# Altium PCB Booster_Common_Channel_RF.PcbDoc (part 1 of 3)
Units mm, origin at the board's own origin, x right, y up, seen from the top; angles counter-clockwise.
Board outline 159.2 x 28.7 mm, 2 copper layers (Top Layer, Bottom Layer), stack 1.071 mm thick; 192 components, 112 nets, 503 pads, 510 vias.
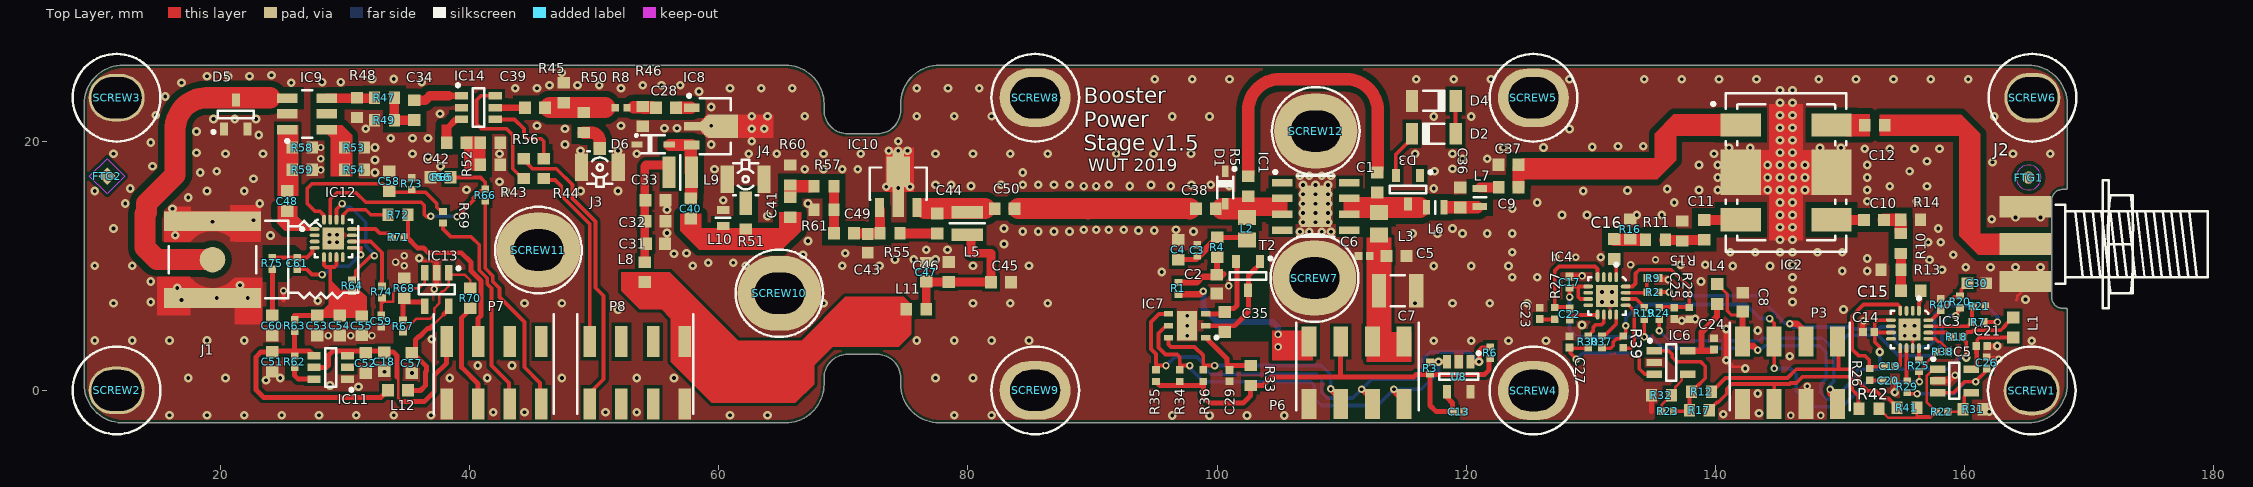
[diagram p0: Top Layer view]
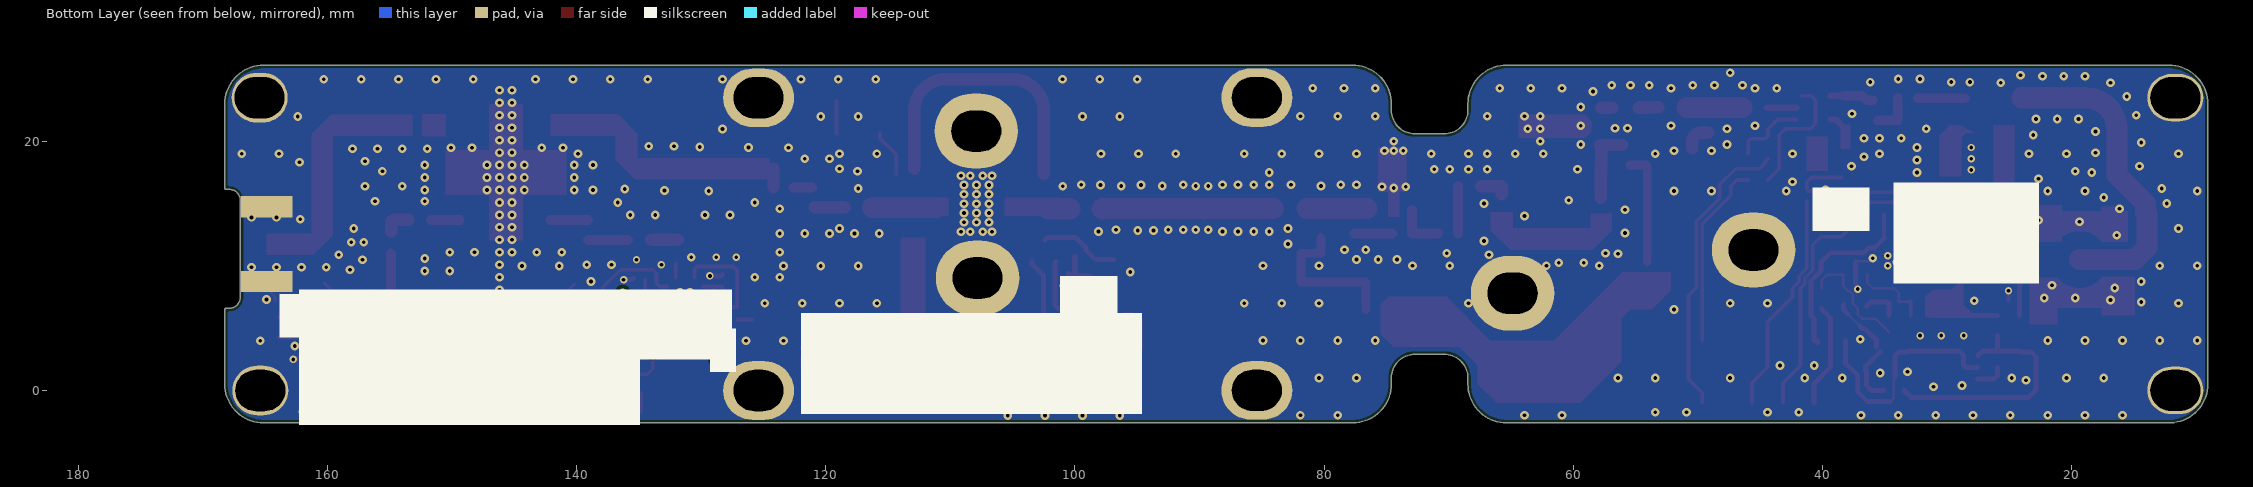
[diagram p1: Bottom Layer view, seen from below]
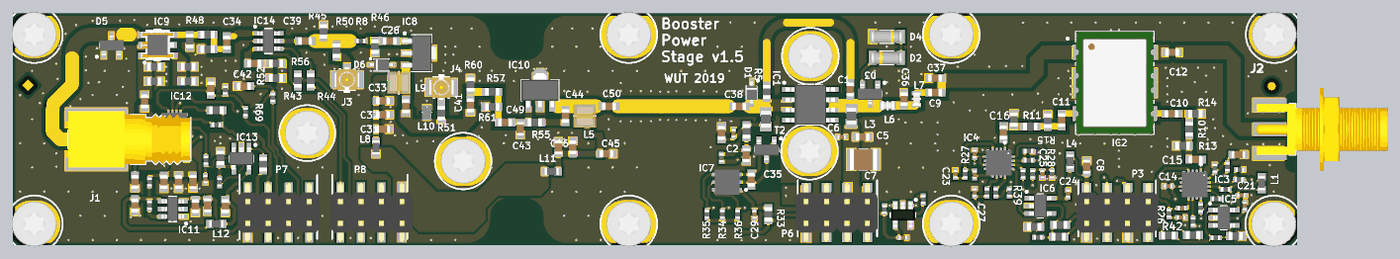
[diagram p3: 3D render of the assembled board from above, using the file's embedded part models]

## Layer stack, top to bottom
Top Layer: signal copper 0.0356
Dielectric 1: dielectric 1, FR408, Dk 3.67
Bottom Layer: signal copper 0.0356

## Board outline
12.028,-2.62 ccw(c12.05,-2.52) 12.05,-2.622 65.35,-2.622 ccw(c65.35,0.48) 68.452,0.48 68.452,0.98 ccw(c68.35,0.98) 68.452,0.981 cw(c70.35,0.98) 70.35,2.878 72.7,2.878 cw(c72.7,0.98) 74.598,0.98 74.598,0.48 cw(c74.7,0.48) 74.598,0.481 74.598,0.48 ccw(c77.7,0.48) 77.7,-2.622 165.15,-2.622 ccw(c165.15,0.48) 168.252,0.48 168.252,6.47 ccw(c168.15,6.47) 168.15,6.572 167.9,6.572 cw(c167.9,7.47) 167.002,7.47 167.002,15.22 cw(c167.9,15.22) 167.9,16.118 168.15,16.118 ccw(c168.15,16.22) 168.252,16.22 168.252,22.98 ccw(c165.15,22.98) 165.15,26.082 77.7,26.082 ccw(c77.7,22.98) 74.598,22.98 ccw(c74.7,22.98) 74.598,22.979 74.598,22.48 cw(c72.7,22.48) 72.7,20.582 70.35,20.582 cw(c70.35,22.48) 68.452,22.479 ccw(c68.35,22.48) 68.452,22.48 68.452,22.98 ccw(c65.35,22.98) 65.35,26.082 12.15,26.082 ccw(c12.15,22.98) 9.048,22.98 9.048,0.48 ccw(c12.15,0.48)

## Design rules (kind name [scope] priority, off if disabled: settings)
AcuteAngle [All] p1: minimum=6.00000000000000E+0001 checktracksonly=FALSE
BoardOutlineClearance [All] p1: gap=0.25 ignorepadtopadclearanceinfootprint=FALSE
Clearance Clearance_50_Ohm [InNetClass('50_Ohm') vs InNet('GND')] p1: gap=0.5 ignorepadtopadclearanceinfootprint=FALSE except(0.152: Arc-SMDPad Track-SMDPad SMDPad-SMDPad)
Clearance [All] p2: gap=0.152 ignorepadtopadclearanceinfootprint=FALSE except(0.279: Arc-Poly Track-Poly SMDPad-Poly THPad-Poly Via-Poly Fill-Fill Fill-Poly Fill-Region Fill-Text Fill-Hole Poly-Poly Poly-Region Poly-Text Poly-Hole Region-Region Region-Text Region-Hole)
ComponentClearance [All] p1: gap=0.1 collisioncheckmode=3 verticalgap=0.254 showdistances=FALSE
HoleSize [All] p1: absolutevalues=TRUE maxlimit=5.08 minlimit=0.127 maxpercent=80.000 minpercent=20.000
MinimumSolderMaskSliver [All] p1: minsoldermaskwidth=0.1
PolygonConnect [All] p1: connectstyle=Direct reliefconductorwidth=0.254 reliefentries=4 polygonreliefangle="90 Angle" airgapwidth=0.254
RoomDefinition Booster_Common_Channel_RF [InComponentClass('Booster_Common_Channel_RF')] p1 off: confinementstyle=ConfineIn formatcopy=TRUE lockcomponents=FALSE outline 169.35,-1.1 296.149,-1.1 296.149,10 169.35,10
RoomDefinition U_Booster_PA_OUT [InComponentClass('U_Booster_PA_OUT')] p2 off: confinementstyle=ConfineIn formatcopy=TRUE lockcomponents=FALSE outline -58.75,-41 -7.95,-41 -7.95,-15.6 -58.75,-15.6
RoomDefinition U_Booster_PA_PREAMP [InComponentClass('U_Booster_PA_PREAMP')] p3 off: confinementstyle=ConfineIn formatcopy=TRUE lockcomponents=FALSE outline 63.39,25.5 6.415,25.5 6.415,-0.6 63.39,-0.6
RoutingVias [All] p1: holewidth=0.711 width=1.27 viastyle="Through Hole" minholewidth=0.711 minwidth=1.27 maxholewidth=0.711 maxwidth=1.27
SolderMaskExpansion [All] p1: expansion=0.102 istentingtop=FALSE
Width Width_50_Ohm [InNetClass('50_Ohm')] p1: maxlimit=2.123 minlimit=0.279 preferedwidth=1.7 minimp=50.000000 maximp=50.000000 favimp=50.000000
Width [All] p2: maxlimit=2 minlimit=0.2 preferedwidth=0.5 minimp=50.000000 maximp=50.000000 favimp=50.000000
27 further rules are at their usual default settings.

## Classes and differential pairs
component class Booster_Common_Channel_RF: FTG1 FTG2 SCREW1 SCREW2 SCREW3 SCREW4 SCREW5 SCREW6 SCREW7 SCREW8 SCREW9 SCREW10 SCREW11 SCREW12
component class U_Booster_PA_OUT: C1 C2 C3 C4 C5 C6 C7 C8 C9 C10 C11 C12 C13 C14 C15 C16 C17 C19 C20 C21 C22 C23 C24 C25 C26 C27 C29 C30 C35 C36 C37 C38 D1 D2 D3 D4 IC1 IC2 IC3 IC4 IC5 IC6 IC7 J2 L1 L2 L3 L4 L6 L7 P3 P6 R1 R2 R3 R4 R5 R6 R7 R9 R10 R11 R12 R13 R14 R15 R16 R17 R18 R19 R20 R21 R22 R23 R24 R25 R26 R27 R28 R29 R30 R31 R32 R33 R34 R35 R36 R37 R38 R39 R40 R41 R42 T2 U8
component class U_Booster_PA_PREAMP: C18 C28 C31 C32 C33 C34 C39 C40 C41 C42 C43 C44 C45 C46 C47 C48 C49 C50 C51 C52 C53 C54 C55 C56 C57 C58 C59 C60 C61 D5 D6 IC8 IC9 IC10 IC11 IC12 IC13 IC14 J1 J3 J4 L5 L8 L9 L10 L11 L12 P7 P8 R8 R43 R44 R45 R46 R47 R48 R49 R50 R51 R52 R53 R54 R55 R56 R57 R58 R59 R60 R61 R62 R63 R64 R65 R66 R67 R68 R69 R70 R71 R72 R73 R74 R75
net class 50_Ohm: NetC1_1 NetC1_2 NetC9_1 NetC9_2 NetC10_1 NetC10_2 NetC11_1 NetC11_2 NetC12_1 NetC12_2 NetC15_2 NetC16_2 NetC28_1 NetC28_2 NetC34_1 NetC34_2 NetC36_2 NetC38_1 NetC38_2 NetC39_1 NetC39_2 NetC40_1 NetC40_2 NetC41_2 NetC42_1 NetC42_2 NetC43_2 NetC44_2 NetC48_1 NetC49_1 NetD5_3 NetIC9_4 NetIC9_6 NetJ3_1 NetJ4_1

## Components (designator, comment, footprint, x,y, rotation, side; value= is the part's Value field where it differs from the comment)
C1 "470pF" CAPC1608X87N 112.871,16.66 r270 top
C2 "4.7uF" CAPC1709X95N 99.969,8.52 r90 top
C3 "100nF" CAPC1005X55N 98.401,11.23 r270 top
C4 "680pF" CAPC1608X87N 96.9,11.27 r270 top
C5 "680pF" CAPC1608X87N 114.4,10.77 r180 top
C6 "100nF" CAPC1005X55N 111.8,10.77 r0 top
C7 "4.7uF" CAPC3225X270N 114.5,7.97 r180 top
C8 "4.7uF" CAPC1709X95N 142.2,7.07 r270 top
C9 "270pF" CAPC1608X87N 123.408,16.284 r0 top
C10 "2.2nF" CAPC1608X87N 152.733,13.66 r180 top
C11 "2.2nF" CAPC1608X87N 139.1,12.87 r90 top
C12 "2.2nF" CAPC1608X87N 152.8,21.27 r180 top
C13 "100nF" CAPC1005X55N 119.4,-1.73 r180 top
C14 "100nF" CAPC1005X55N 152.3,4.67 r0 top
C15 "2.2nF" CAPC1608X87N 155.7,7.97 r180 top
C16 "2.2nF" CAPC1608X87N 131.882,11.341 r90 top
C17 "100nF" CAPC1005X55N 128.3,8.67 r270 top
C18 "4.7uF" CAPC1709X95N 33.15,2.28 r90 top
C19 "1nF" CAPC1005X55N 154,1.92 r180 top
C20 "100nF" CAPC1005X55N 153.9,0.77 r0 top
C21 "100nF" CAPC1005X55N 161.391,3.54 r180 top
C22 "1nF" CAPC1005X55N 128.306,6.11 r90 top
C23 "100nF" CAPC1005X55N 125.9,6.17 r90 top
C24 "100nF" CAPC1005X55N 139.9,3.72 r270 top
C25 "100nF" CAPC1005X55N 136.7,6.17 r90 top
C26 "10nF" CAPC1005X55N 161.789,2.19 r270 top
C27 "10nF" CAPC1005X55N 128.3,3.87 r270 top
C28 "680pF" CAPC1608X87N 55.75,22.68 r0 top
C29 "100nF" CAPC1005X55N 101,1.17 r90 top
C30 "Undefined" CAPC1608X90N 161,8.58 r180 top
C31 "4.7uF" CAPC1709X95N 54.92,11.745 r180 top
C32 "100nF" CAPC1608X87N 54.92,13.545 r180 top
C33 "680pF" CAPC1608X87N 54.92,15.245 r180 top
C34 "680pF" CAPC1608X87N 35.55,22.48 r90 top
C35 "2.2nF" CAPC1608X87N 100.6,5.47 r90 top
C36 "2.7pF" CAPC1608X87N 119.539,15.47 r270 top
C37 "0.9pF" CAPC1608X87N 123.4,18.09 r0 top
C38 "3.3nF" CAPC1608X87N 99.1,14.57 r180 top
C39 "680pF" CAPC1608X87N 45.25,22.68 r0 top
C40 "39pF" CAPC1608X87N 57.75,14.58 r270 top
C41 "330pF" CAPC1608X87N 65.75,14.68 r90 top
C42 "680pF" CAPC1608X87N 38.95,19.88 r180 top
C43 "Undefined" CAPC1608X90N 71.95,11.78 r90 top
C44 "2.2nF" CAPC1608X87N 77.55,13.38 r90 top
C45 "680pF" CAPC1608X87N 82.65,8.68 r180 top
C46 "100nF" CAPC1608X87N 78.45,9.48 r270 top
C47 "4.7uF" CAPC1709X95N 76.65,9.48 r270 top
C48 "2.2nF" CAPC1608X87N 25.35,15.18 r90 top
C49 "680pF" CAPC1608X87N 70.05,12.58 r0 top
C50 "680pF" CAPC1608X87N 82.95,14.58 r0 top
C51 "100nF" CAPC1608X87N 24.15,2.28 r270 top
C52 "100nF" CAPC1608X87N 31.65,2.17 r90 top
C53 "680pF" CAPC1608X87N 27.75,5.18 r90 top
C54 "100nF" CAPC1608X87N 29.55,5.18 r90 top
C55 "4.7uF" CAPC1709X95N 31.35,5.18 r90 top
C56 "47nF" CAPC1608X87N 37.65,17.08 r180 top
C57 "100nF" CAPC1608X87N 35.357,2.17 r90 top
C58 "100nF" CAPC1608X87N 33.55,16.78 r270 top
C59 "10nF" CAPC1005X55N 32.9,5.54 r90 top
C60 "100nF" CAPC1608X87N 24.15,5.18 r270 top
C61 "1nF" CAPC1005X55N 26.15,10.18 r90 top
D1 "AQ4020-01FTG" SOD2512X110N 100.65,16.27 r270 top
D2 "BZV55-B33" DIOMELF3515N 117.4,20.585 r0 top
D3 "SZNUP1301ML3T1G" SOT95P240X110-3N 115.33,16.095 r270 top
D4 "BZV55-B33" DIOMELF3515N 117.4,23.22 r180 top
D5 "SZNUP1301ML3T1G" SOT95P240X110-3N 21.224,22.13 r90 top
D6 "AQ4021-01FTG-C" SOD2513X114N 54.721,19.73 r0 top
FTG1 "Use only in PCB" FIDUCIAL_TOP_C100-200 165.15,17.07 r90 top
FTG2 "Use only in PCB" FIDUCIAL_TOP_S100-200 10.888,17.18 r90 top
IC1 "NPTB00004A" SOIC127P610X167-9N-R245X335 107.92,14.755 r0 top
IC2 "SYDC-20-62HP+" MINI-CIRCUITS_AH202-1 145.682,17.478 r0 top
IC3 "ADL5904ACPZN-R7" QFN50P300X300X80-17N-S175 155.6,4.87 r270 top
IC4 "ADL5904ACPZN-R7" QFN50P300X300X80-17N-S175 131.3,7.57 r270 top
IC5 "MCP6291T-E/OT" SOT95P270X145-5N 159.2,0.74 r0 top
IC6 "MCP6291T-E/OT" SOT95P270X145-5N 136.45,2.22 r0 top
IC7 "MAX6642ATT94+T" SON95P300X300X80-7N-R160X240 97.6,5.17 r180 top
IC8 "ADL5536ARKZ" ANALOG-DEVICES_SOT-89(RK-3) 59.715,21.18 r0 top
IC9 "TCD-9-1WX+" MINI-CIRCUITS_DB1627 26.95,22.18 r90 top
IC10 "PHA-1+" MINI-CIRCUITS_DF782 74.4,16.58 r0 top
IC11 "ADP3300ARTZ-3.3-RL7" SOT95P280X145-6N 28.85,1.828 r180 top
IC12 "ADL5904ACPZN-R7" QFN50P300X300X80-17N-S175 29.05,12.18 r0 top
IC13 "MCP6291T-E/OT" SOT95P270X145-5N 37.35,8.08 r270 top
IC14 "HMC544AE" SOT95P280X145-6N 40.7,22.68 r0 top
J1 "SMA" LINK_CONSMA002-SMD-G 19.35,10.48 r0 top
J2 "SMA" MOLEX_73251-2120 164.9,11.72 r180 top
J3 "U.FL" HIROSE_U.FL-R-SMT-1(10) 50.45,17.88 r180 top
J4 "U.FL" HIROSE_U.FL-R-SMT-1(10) 62.15,16.93 r0 top
L1 "1000R@100MHz" INDC1608X95N 163.904,5.03 r90 top
L2 "1uH" INDC2113X60N 102.4,12.97 r90 top
L3 "1uH" INDC2113X60N 113,13.37 r270 top
L4 "1000R@100MHz" INDC1608X95N 140.15,7.72 r90 top
L5 "1uH" IND_ABRACON_AISC-1008 79.95,13.38 r90 top
L6 "4.7nH" IND_MURATA_LQW18AN_G8 117.514,14.674 r0 top
L7 "6.8nH" IND_MURATA_LQW18AN_G8 121.1,15.47 r90 top
L8 "1000R@100MHz" INDC1608X95N 54.046,9.47 r90 top
L9 "1uH" IND_ABRACON_AISC-1008 56.9,17.48 r0 top
L10 "330nH" IND_COILCRAFT_0603LS 60.35,13.83 r270 top
L11 "1000R@100MHz" INDC1608X95N 75.85,6.48 r180 top
L12 "1000R@100MHz" INDC1608X95N 34.25,-0.02 r180 top
P3 "ZL264-8DG" HDR2X4_SMD#1 146,1.4 r90 top value=-
P6 "ZL264-8DG" HDR2X4_SMD#1 111.2,1.4 r90 top value=-
P7 "ZL264-8DG" HDR2X4_SMD#2 41.95,1.4 r90 top value="should be fixed with thermal glue"
P8 "ZL264-8DG" HDR2X4_SMD#2 53.45,1.4 r90 top value="should be fixed with thermal glue"
R1 "0" RESC1005X40N 96.9,8.17 r270 top
R2 "0" RESC1005X40N 135,7.87 r0 top
R3 "10k" RESC1005X40N 117.1,1.77 r90 top
R4 "39" RESC1608X55N 100,11.47 r90 top
R5 "750" RESC1608X55N 102.5,16.37 r90 top
R6 "10k" RESC1005X40N 121.925,3 r90 top
R7 "0" RESC1005X40N 161.1,5.47 r0 top
R8 "0" RESC1005X40N 52.15,22.68 r0 top
R9 "0" RESC1005X40N 135.011,9 r180 top
R10 "71R5" RESC1608X55N 154.9,11.77 r90 top
R11 "71R5" RESC1608X55N 135.2,12.07 r180 top
R12 "Undefined" RESC1608X55N 138.9,-0.14 r0 top
R13 "46R4" RESC1608X55N 154.1,9.67 r0 top
R14 "96R5" RESC1608X55N 155.682,13.67 r180 top
R15 "96R5" RESC1608X55N 137.36,12.77 r270 top
R16 "46R4" RESC1608X55N 133.162,12.93 r270 top
R17 "100" RESC1608X55N 138.722,-1.632 r0 top
R18 "10k" RESC1005X40N 159.4,4.27 r180 top
R19 "10k" RESC1005X40N 134.3,6.17 r270 top
R20 "0" RESC1005X40N 159.65,7.089 r90 top
R21 "0" RESC1005X40N 161.194,6.72 r180 top
R22 "10k" RESC1005X40N 158.2,-1.73 r0 top
R23 "10k" RESC1005X40N 136.166,-1.698 r180 top
R24 "0" RESC1005X40N 135.5,6.17 r90 top
R25 "0" RESC1005X40N 156.35,1.96 r90 top
R26 "3R9" RESC1005X40N 152.4,1.27 r270 top
R27 "3R9" RESC1005X40N 127.1,6.17 r270 top
R28 "10k" RESC1005X40N 137.9,6.17 r270 top
R29 "0" RESC1005X40N 155.4,0.27 r90 top
R30 "0" RESC1005X40N 129.8,3.87 r90 top
R31 "20k" RESC1608X55N 160.691,-1.529 r180 top
R32 "20k" RESC1608X55N 135.68,-0.392 r0 top
R33 "39" RESC1608X55N 102.7,1.17 r270 top
R34 "10k" RESC1005X40N 97,1.17 r90 top
R35 "10k" RESC1005X40N 95.1,1.17 r90 top
R36 "10k" RESC1005X40N 98.9,1.17 r90 top
R37 "0" RESC1005X40N 130.9,3.87 r90 top
R38 "0" RESC1005X40N 158.279,3.08 r0 top
R39 "0" RESC1005X40N 132.6,3.87 r270 top
R40 "0" RESC1005X40N 158.1,6.87 r90 top
R41 "100" RESC1608X55N 155.383,-1.402 r0 top
R42 "Undefined" RESC1608X55N 152.335,-1.478 r0 top
R43 "100" RESC1608X55N 44.35,17.78 r90 top
R44 "100" RESC1608X55N 45.95,17.78 r270 top
R45 "Undefined" RESC1608X55N 47.55,23.88 r270 top
R46 "Undefined" RESC1608X55N 53.9,21.98 r90 top
R47 "30" RESC1608X55N 33.15,23.48 r0 top
R48 "180" RESC1608X55N 30.95,22.68 r270 top
R49 "180" RESC1608X55N 33.15,21.68 r180 top
R50 "Undefined" RESC1608X55N 49.15,21.48 r90 top
R51 "Undefined" RESC1608X55N 62.15,13.73 r270 top
R52 "100" RESC1608X55N 41.65,18.08 r180 top
R53 "100" RESC1608X55N 30.75,19.48 r180 top
R54 "100" RESC1608X55N 30.75,17.68 r180 top
R55 "1k" RESC1608X55N 73.75,12.58 r0 top
R56 "100" RESC1608X55N 41.65,19.88 r0 top
R57 "42R2" RESC1608X55N 68.45,16.38 r0 top
R58 "169" RESC1608X55N 26.55,19.48 r180 top
R59 "169" RESC1608X55N 26.55,17.68 r180 top
R60 "130" RESC1608X55N 65.75,17.28 r90 top
R61 "130" RESC1608X55N 68.45,14.48 r180 top
R62 "10k" RESC1005X40N 25.95,2.28 r90 top
R63 "0" RESC1005X40N 25.95,5.18 r90 top
R64 "10k" RESC1005X40N 30.55,8.38 r90 top
R65 "0" RESC1005X40N 37.825,17.08 r0 top
R66 "0" RESC1005X40N 41.25,15.66 r90 top
R67 "10k" RESC1005X40N 34.65,5.146 r90 top
R68 "20k" RESC1608X55N 34.75,8.18 r270 top
R69 "0" RESC1005X40N 37.85,13.88 r90 top
R70 "100" RESC1608X55N 40.05,7.38 r270 top
R71 "0" RESC1005X40N 34.25,12.28 r180 top
R72 "Undefined" RESC1608X55N 34.25,14.08 r0 top
R73 "10k" RESC1005X40N 35.357,16.58 r90 top
R74 "0" RESC1005X40N 32.95,7.88 r90 top
R75 "0" RESC1005X40N 24.15,10.18 r90 top
SCREW1 "M3x6" BOSSARD_BN5687-3061605_v 165.4,-0.03 r0 top locked
SCREW2 "M3x6" BOSSARD_BN5687-3061605_v 11.65,-0.02 r0 top locked
SCREW3 "M3x6" BOSSARD_BN5687-3061605_v 11.65,23.48 r0 top locked
SCREW4 "M3x6" BOSSARD_BN5687-3061605_v 125.4,-0.03 r0 top locked
SCREW5 "M3x6" BOSSARD_BN5687-3061605_v 125.4,23.47 r0 top locked
SCREW6 "M3x6" BOSSARD_BN5687-3061605_v 165.46,23.48 r0 top locked
SCREW7 "M3x6" BOSSARD_BN5687-3061605_v 107.82,9 r0 top locked
SCREW8 "M3x6" BOSSARD_BN5687-3061605_v 85.4,23.48 r0 top locked
SCREW9 "M3x6" BOSSARD_BN5687-3061605_v 85.4,-0.02 r0 top locked
SCREW10 "M3x6" BOSSARD_BN5687-3061605_v 64.86,7.78 r0 top locked
SCREW11 "M3x6" BOSSARD_BN5687-3061605_v 45.52,11.25 r0 top locked
SCREW12 "M3x6" BOSSARD_BN5687-3061605_v 107.92,20.8 r0 top locked
T2 "MMBT3906LT1G" SOT95P240X110-3N 102.483,9.17 r270 top
U8 "DNP" SOT23-5_N 119.4,1.07 r270 top value=24AA01H

## Footprints (in the part's own frame and the unit in brackets; to place one, negate y for a bottom-side part, rotate by r counter-clockwise, add the part's x,y. Pads: shape width x height; smd on the part's side, far side on the other; paste and mask are expansions set on the pad)
ANALOG-DEVICES_SOT-89(RK-3) [mm] "SOT89, 1.50mm Pitch; 3-Leads, 2.5mm W X 4.5mm L X 1.6mm H body"
  rect 1.25x0.7 smd: 1(-1.89,1.5) 3(-1.89,-1.5)
  rect 1.35x0.7 smd: 2(-1.84,0)
  rect 0.131x0.131 smd: 2(-0.968,-0.491) 2(-0.968,0.49) 2(-0.706,-0.753) 2(-0.706,0.753)
  rect 0.262x0.262 smd: 2(-0.771,-0.556) 2(-0.771,0.556)
  rect 3x0.85 smd: 2(0.335,0)
  rect 2.475x0.525 smd: 2(0.597,-0.688) 2(0.597,0.687)
  Top Layer region: -1.165,0.425 -0.64,0.95 -0.64,-0.95 -1.165,-0.425
  silkscreen extent -2.22,-2.25 1.24,2.57, body extent -2.44,-2.25 1.81,2.25, height 1.6
BOSSARD_BN5687-3061605_v [mm] "M3 L=6mm Hexalobular Socket Pan Head Screw, Fully Threaded - Stainless Steel A2"
  silkscreen extent -3.52,-3.52 3.52,3.52, body extent -2.8,-2.8 2.8,2.8, height 2.4
CAPC1005X55N [mm] "Capacitor, Non-Polarized, Chip; 1.00mm L X 0.50mm W X 0.70mm H, IPC Medium Density"
  rect 0.62x0.62 smd: 1(-0.45,0) 2(0.45,0)
  body extent -0.52,-0.27 0.53,0.28, height 0.55
CAPC1608X87N [mm] "Chip Capacitor, Body 1.6x0.8mm IPC Medium Density"
  rect 0.95x1 smd: 1(-0.8,0) 2(0.8,0)
  body extent -0.87,-0.47 0.88,0.48, height 0.87
CAPC1608X90N [mm] "Chip Capacitor, Body 1.6x0.8mm IPC Medium Density"
  rect 0.95x0.95 smd: 1(-0.75,0) 2(0.75,0)
  body extent -0.85,-0.45 0.85,0.45, height 0.9
CAPC1709X95N [mm] "Capacitor, non-Polarized, Chip; 1.65mm L X 0.85mm W X 0.95mm H,IPC Medium Density"
  rect 0.95x1 smd: 1(-0.75,0) 2(0.75,0)
  body extent -0.87,-0.47 0.88,0.48, height 0.95
CAPC3225X270N [mm] "Chip Capacitor, Body 3.2x2.5mm, IPC Medium Density"
  rect 1.15x2.7 smd: 1(-1.5,0) 2(1.5,0)
  silkscreen extent -0.55,-1.25 0.55,1.25, body extent -1.7,-1.35 1.7,1.35, height 2.7
DIOMELF3515N [mm] "SOD80C, MELF Diode, 2-Leads, Body 3.5x1.5mm, IPC Medium Density"
  rect 1x1.75 smd: 1(-1.75,0) 2(1.75,0)
  silkscreen extent -0.85,-0.8 0.85,0.8, body extent -1.85,-0.8 1.85,0.8, height 1.6
FIDUCIAL_TOP_C100-200 [mm] "Round Fiducial Target, Top Layer, 1.0mm, Top Solder 2.0mm, Keepout =2.0mm"
  round 1 smd paste-0.51 mask+0.5: FTG2(0,0)
  Top Layer keep-out circle w0.1: c0,0 r1
FIDUCIAL_TOP_S100-200 [mm] "Square Fiducial Target, Top Layer, 1.0mm, Top Solder 2.0mm, Keepout =2.0mm"
  rect 1x1 smd rot 45 paste-0.51 mask+0.5: 1(0,0)
  Top Layer keep-out region: 1.414,0 0,-1.414 -1.414,0 0,1.414
HDR2X4_SMD#1 [mm]
  rect 2.4x1.2 smd: 1(-2.5,-3.81) 2(2.5,-3.81) 3(-2.5,-1.27) 4(2.5,-1.27) 5(-2.5,1.27) 6(2.5,1.27) 7(-2.5,3.81) 8(2.5,3.81)
  silkscreen extent -3,-4.79 4,4.83, body extent -3.65,-5.08 3.65,5.08, height 9.3
HDR2X4_SMD#2 [mm]
  rect 2.5x1 smd: 1(-2.5,-3.81) 2(2.5,-3.81) 3(-2.5,-1.27) 4(2.5,-1.27) 5(-2.5,1.27) 6(2.5,1.27) 7(-2.5,3.81) 8(2.5,3.81)
  silkscreen extent -3.3,-4.79 4.7,4.83, body extent -3.65,-5.08 3.65,5.08, height 9.3
HIROSE_U.FL-R-SMT-1(10) [mm] "Up to 6GHz Ultra Small Surface Mount Male Coaxial Connectors U.FL Series"
  rect 1x1.05 smd: 1(0,-1.525)
  rect 1.05x2.2 smd: 2(-1.475,0) 2(1.475,0)
  silkscreen extent -1,-1.3 1,1.55, body extent -1.5,-1.55 1.5,1.55, height 1.25
IND_ABRACON_AISC-1008 [mm] "Inductor, Molded Body; 2.92mm L X 2.79mm W, AISC-1008 Series"
  rect 1.02x2.54 smd: 1(-0.905,0) 2(0.905,0)
  silkscreen extent 0,-1.4 0,1.4, body extent -1.46,-1.39 1.46,1.4, height 2.29
IND_COILCRAFT_0603LS [mm] "SMD Inductor  Body Width 1.27mm Body Lenght 1.8mm Height 1.12mm, 0603LS Series"
  rect 0.64x1.02 smd: 1(-0.64,0) 2(0.64,0)
  silkscreen extent 0,-0.58 0,0.58, body extent -0.9,-0.58 0.9,0.58, height 1.12
IND_MURATA_LQW18AN_G8 [mm] "SMT inductor 0603, Body Width 0.99mm Body Lenght 1.65mm Height 1mm"
  rect 0.57x1.15 smd: 1(-0.715,0) 2(0.715,0)
  silkscreen extent 0,-0.5 0,0.5, body extent -0.82,-0.49 0.83,0.5, height 1
INDC1608X95N [mm] "Chip Inductor, 2-Leads, EIA 0603, Metric 1608, Body 1.6x0.8mm, IPC Medium Density"
  rect 0.95x1 smd: 1(-0.8,0) 2(0.8,0)
  body extent -0.87,-0.47 0.88,0.48, height 0.95
INDC2113X60N [mm] "Chip Inductor, EIA 0805, Metric 2012, Body 2.1x1.25mm, IPC Medium Density"
  rect 1.2x1.45 smd: 1(-0.9,0) 2(0.9,0)
  body extent -1.05,-0.62 1.05,0.63, height 0.6
LINK_CONSMA002-SMD-G [mm] "SSMA Female Right Angled - Surface Mount"
  round 2.05 smd: 1(0,0)
  rect 7.76x1.6 smd: 2(0,-3.08) 2(0,3.08)
  Top Layer region: -3.88,1.44 -3.88,3.88 3.88,3.88 3.88,1.44 1.768,1.44 0.979,2.059 0,2.28 -0.979,2.059 -1.768,1.44 -1.768,1.44
  Top Layer region: 3.88,-1.44 3.88,-3.88 -3.88,-3.88 -3.88,-1.44 -1.768,-1.44 -0.979,-2.059 0,-2.28 0.979,-2.059 1.768,-1.44 1.768,-1.44
  silkscreen extent -3.5,-3.12 11.7,3.12, body extent -3.5,-3.5 11.7,3.5, height 10.8
MINI-CIRCUITS_AH202-1 [mm] "MINI-CIRCUITS AH202-1 Case, Body 12.7mm L X 9.65mm W X 6.35mm H"
  rect 3.23x1.88 smd: 1(3.643,3.81) 4(3.643,-3.81) 5(-3.643,-3.81) 8(-3.643,3.81)
  rect 3.23x2 smd: 2(3.643,0.83) 3(3.643,-0.83) 6(-3.643,-0.83) 7(-3.643,0.83)
  Top Layer region: -1.335,1.78 -4.825,1.78 -4.825,-1.78 -1.335,-1.78 -1.335,-5.46 1.335,-5.46 1.335,-1.78 4.825,-1.78 4.825,1.78 1.335,1.78 1.335,5.46 -1.335,5.46
  silkscreen extent -5.97,-6.35 4.82,6.35, body extent -4.82,-6.35 4.83,6.35, height 6.35
MINI-CIRCUITS_DB1627 [mm] "MINI-CIRCUITS Case Style DB1627 - Body 4.06X3.81mm"
  rect 0.76x1.65 smd: 1(-1.27,1.59) 2(0,1.59) 3(1.27,1.59) 4(1.27,-1.59) 5(0,-1.59) 6(-1.27,-1.59)
  silkscreen extent -2.3,-0.42 1.91,1.72, body extent -1.9,-2.03 1.91,2.03, height 4.06
MINI-CIRCUITS_DF782 [mm] "MINI-CIRCUITS DF782 Case, 1.50mm pitch; 4 pin, 2.44mm W X 4.49mm L"
  rect 0.71x1.5 smd: 1(-1.5,-1.915) 3(1.5,-1.915)
  rect 0.917x2.41 smd: 2(0,-1.46)
  rect 1.905x2.427 smd: 4(0,0.958)
  rect 0.92x0.493 smd: 4(0,2.418)
  Top Layer region: -0.457,-0.751 -0.953,-0.255 -0.953,2.172 -0.46,2.665 0.46,2.665 0.953,2.172 0.953,-0.255 0.457,-0.751 0.457,-2.665 -0.457,-2.665
  silkscreen extent -2.3,-1.3 2.3,1.3, body extent -2.3,-2.12 2.3,2.12, height 1.6
MOLEX_73251-2120 [mm] "50 Ohm, SMA Edge Mount PCB, With Jam Nut And Lock Washer"
  rect 4.19x1.78 smd: 1(0,0)
  rect 4.19x1.7 smd: 2(0,3) 2(0,-3)
  rect 4.19x1.7 smd far side: 2(0,3) 2(0,-3)
  silkscreen extent -14.64,-5.13 -2.44,5.13, body extent -14.64,-5.13 1.62,5.13, height 5.76
QFN50P300X300X80-17N-S175 [mm] "QFN, 0.50mm Pitch, Square; 16 Pin, 3.00mm L X 3.00mm W X 0.80mm H Body (w/Thermal Tab 1.75 X 1.75mm),  IPC Medium Density"
  oval 0.8x0.3 smd: 1(-1.5,0.75) 2(-1.5,0.25) 3(-1.5,-0.25) 4(-1.5,-0.75) 9(1.5,-0.75) 10(1.5,-0.25) 11(1.5,0.25) 12(1.5,0.75)
  oval 0.3x0.8 smd: 5(-0.75,-1.5) 6(-0.25,-1.5) 7(0.25,-1.5) 8(0.75,-1.5) 13(0.75,1.5) 14(0.25,1.5) 15(-0.25,1.5) 16(-0.75,1.5)
  rect 1.75x1.75 smd: 17(0,0)
  silkscreen extent -2.62,-1.5 1.5,1.5, body extent -1.57,-1.57 1.58,1.58, height 0.8
RESC1005X40N [mm] "Chip Resistor, EIA 0402, Metric 1005, Body 1.0x0.5mm, IPC Medium Density"
  rect 0.58x0.62 smd: 1(-0.47,0) 2(0.47,0)
  body extent -0.52,-0.27 0.53,0.28, height 0.4
RESC1608X55N [mm] "Chip Resistor, EIA 0603, Metric 1608, Body 1.6x0.8mm, IPC Medium Density"
  rect 0.9x1 smd: 1(-0.8,0) 2(0.8,0)
  body extent -0.87,-0.47 0.88,0.48, height 0.55
SOD2512X110N [mm] "Small Outline Diode (SOD-323), 1.70mm W X 1.25mm L X 1.10mm H body,  IPC Medium Density"
  rect 0.9x0.5 smd: 1(-1.3,0) 2(1.3,0)
  silkscreen extent -1.62,-0.65 0.85,0.88, body extent -1.35,-0.67 1.35,0.68, height 1.1
SOD2513X114N [mm] "SOD-323 Diode; 1.75mm W X 1.30mm L X 1.14mm H Body, IPC Medium Density"
  rect 0.9x0.5 smd: 1(-1.3,0) 2(1.3,0)
  silkscreen extent -1.45,-0.72 0.95,0.82, body extent -1.4,-0.72 1.4,0.73, height 1.15
SOIC127P610X167-9N-R245X335 [mm] "SOIC, 1.27mm pitch; 8 pin, 3.89mm W X 4.90mm L X 1.67mm H body (w/thermal tab 2.45mm X 3.35mm), IPC Medium Density"
  rect 1.65x0.6 smd: 1(-2.7,1.905) 2(-2.7,0.635) 3(-2.7,-0.635) 4(-2.7,-1.905) 5(2.7,-1.905) 6(2.7,-0.635) 7(2.7,0.635) 8(2.7,1.905)
  rect 2.45x3.35 smd: 9(0,0)
  silkscreen extent -3.37,-2.45 1.5,2.87, body extent -3.05,-2.45 3.05,2.45, height 1.67
SON95P300X300X80-7N-R160X240 [mm] "SON, 0.95mm Pitch; 6 Pin, 3.00mm W X 3mm L X 0.80mm H body (w/Thermal Tab 1.6mm x 2.4mm)"
  rect 0.75x0.45 smd: 1(-1.5,0.95) 2(-1.5,0) 3(-1.5,-0.95) 4(1.5,-0.95) 5(1.5,0) 6(1.5,0.95)
  rect 1.6x2.4 smd: 7(0,0)
  silkscreen extent -2.48,0.83 -2.23,1.07, body extent -1.55,-1.55 1.55,1.55, height 0.8
SOT23-5_N [mm] "SOT23, 5-Leads, Body 2.9x1.6mm, Pitch 0.95mm, Lead Span 2.8mm, IPC Medium Density"
  rect 1.1x0.65 smd: 1(-1.2,0.95) 2(-1.2,0) 3(-1.2,-0.95) 4(1.2,-0.95) 5(1.2,0.95)
  silkscreen extent -2.02,-1.55 0.25,1.73, body extent -1.63,-1.5 1.57,1.5, height 1.1
SOT95P240X110-3N [mm] "SOT23 3-Leads, Pitch 0.95mm, Body 1.3x2.9mm, IPC Medium Density"
  rect 1.05x0.65 smd: 1(-1.15,0.95) 2(-1.15,-0.95) 3(1.15,0)
  silkscreen extent -1.52,-1.45 0.3,1.92, body extent -1.25,-1.5 1.25,1.5, height 1.1
SOT95P270X145-5N [mm] "SOT, 0.95mm Pitch; 5 Pin,1.55mm W X 2.90mm L X 1.45mm H body, IPC Medium Density"
  rect 1.25x0.6 smd: 1(-1.35,0.95) 2(-1.35,0) 3(-1.35,-0.95) 4(1.35,-0.95) 5(1.35,0.95)
  silkscreen extent -1.82,-1.45 0.4,1.87, body extent -1.35,-1.45 1.35,1.45, height 1.45
SOT95P280X145-6N [mm] "SOT23, 6-Leads, Body 1.6x3.0mm, Pitch 0.95mm, IPC Medium Density"
  rect 1.05x0.6 smd: 1(-1.35,0.95) 2(-1.35,0) 3(-1.35,-0.95) 4(1.35,-0.95) 5(1.35,0) 6(1.35,0.95)
  silkscreen extent -1.78,-1.55 0.45,1.92, body extent -1.4,-1.5 1.4,1.5, height 1.45

## Part data
C1: "Non-polarised capacitor", Case=0603, Manufacturer=GENERIC, Manufacturer1 ComponentHeight=0.87mm, Manufacturer1 Example=Multicomp, Manufacturer1 Part Number=MCMT18N471F500CT, Manufacturer Part Number=CC0603_470PF_50V_1%_NP0, Tolerance=±1%, Voltage=50V, Author=GK, Component Type=Standard, CreateDate=03.12.2007, HelpURL=\\cern.ch\dfs\Applications\Altium\Datasheets\CC0603_NP0_PHYCOMP.pdf, LatestRevisionDate=03.12.2007, Mounted=Yes, Part Description="SMD Multilayer Chip Ceramic Capacitor", Part Number=CC0603_470PF_50V_1%_NP0, Pin Count=2, Sense=No, SMD=Yes, Socket=No, Status=Preferred, TC=C0G/NP0
C2 C8 C18 C31 C47 C55: library part CC0603_4.7UF_16V_10%_X5R, "Non-polarised capacitor", Case=0603, Manufacturer=GENERIC, Manufacturer1 ComponentHeight=0.95mm, Manufacturer1 Example="TAIYO YUDEN", Manufacturer1 Part Number=EMK107ABJ475KA-T, Tolerance=±10%, Voltage=16V, Author="CERN DEM JLC", Component Type=Standard, CreateDate=16.12.2013, HelpURL=\\cern.ch\dfs\Applications\Altium\Datasheets\CC0603_X7R_TAIYO-YUDEN_HIGH-VALUE.pdf, LatestRevisionDate=16.09.2014, Manufacturer Part Number=CC0603_4.7UF_16V_10%_X5R, Mounted=Yes, Part Description="SMD Multilayer Chip Ceramic Capacitor", Part Number=CC0603_4.7UF_16V_10%_X5R, Pin Count=2, Sense=No, SMD=Yes, Socket=No, Status=None, TC=X5R
C3 C6 C13 C14 C17 C20 C21 C23 C24 C25 C29: library part CC0402_100NF_50V_10%_X7R, "Non-polarised capacitor", Case=0402, Manufacturer=GENERIC, Manufacturer1 ComponentHeight=0.55mm, Manufacturer1 Example=MURATA, Manufacturer1 Part Number=GRM155R71H104KE14D, Tolerance=±10%, Voltage=50V, Author="CERN DEM MR", Component Type=Standard, CreateDate=30/06/2017, HelpURL=\\cern.ch\dfs\Applications\Altium\Datasheets\CC0402_MURATA_GRM155R71H104KE14D.pdf, LatestRevisionDate=30/06/2017, Manufacturer Part Number=CC0402_100NF_50V_10%_X7R, Mounted=Yes, Part Description="SMD Multilayer Chip Ceramic Capacitor", Part Number=CC0402_100NF_50V_10%_X7R, Pin Count=2, Sense=No, SMD=Yes, Socket=No, Status=None, TC=X7R
C4 C5 C28 C33 C34 C39 C42 C45 C49 C50 C53: library part CC0603_680PF_50V_5%_NP0, "Non-polarised capacitor", Case=0603, Manufacturer=GENERIC, Manufacturer1 ComponentHeight=0.87mm, Manufacturer1 Example=PHYCOMP, Manufacturer1 Part Number=223886715681, Tolerance=±5%, Voltage=50V, Author="CERN DEM JLC", Component Type=Standard, CreateDate=03.12.2007, HelpURL=\\cern.ch\dfs\Applications\Altium\Datasheets\CC0603_NP0_PHYCOMP.pdf, LatestRevisionDate=03.12.2007, Manufacturer Part Number=CC0603_680PF_50V_5%_NP0, Mounted=Yes, Part Description="SMD Multilayer Chip Ceramic Capacitor", Part Number=CC0603_680PF_50V_5%_NP0, Pin Count=2, Sense=No, SMD=Yes, Socket=No, Status=Preferred, TC=C0G/NP0
C7: library part CC1210_4.7UF_50V_10%_X7R, "Non-polarised capacitor", Case=1210, Manufacturer=GENERIC, Manufacturer1 ComponentHeight=2.7mm, Manufacturer1 Example=KEMET, Manufacturer1 Part Number=C1210C475K5RAC, Tolerance=±10%, Voltage=50V, Author="CERN DEM JLC", Component Type=Standard, CreateDate=01.04.2009, HelpURL=\\cern.ch\dfs\Applications\Altium\Datasheets\CC1210_X7R_KEMET.pdf, LatestRevisionDate=05.05.2009, Manufacturer Part Number=CC1210_4.7UF_50V_10%_X7R, Mounted=Yes, Part Description="SMD Multilayer Chip Ceramic Capacitor", Part Number=CC1210_4.7UF_50V_10%_X7R, Pin Count=2, Sense=No, SMD=Yes, Socket=No, Status=None, TC=X7R
C9: "Non-polarised capacitor", Case=0603, Manufacturer=GENERIC, Manufacturer1 ComponentHeight=0.87mm, Manufacturer1 Example=Kemet, Manufacturer1 Part Number=C0603C271F5GACTU, Manufacturer Part Number=CC0603_270PF_50V_1%_NP0, Tolerance=±1%, Voltage=50V, Author=GK, Component Type=Standard, CreateDate=03.12.2007, HelpURL=\\cern.ch\dfs\Applications\Altium\Datasheets\CC0603_NP0_PHYCOMP.pdf, LatestRevisionDate=03.12.2007, Mounted=Yes, Part Description="SMD Multilayer Chip Ceramic Capacitor", Part Number=CC0603_270PF_50V_1%_NP0, Pin Count=2, Sense=No, SMD=Yes, Socket=No, Status=Preferred, TC=C0G/NP0
C10 C11 C12 C15 C16 C35 C44 C48: library part CC0603_2.2NF_50V_5%_C0G, "Non-polarised capacitor", Case=0603, Manufacturer=GENERIC, Manufacturer1 ComponentHeight=0.9mm, Manufacturer1 Example=TDK, Manufacturer1 Part Number=C1608C0G1H222J080AA, Tolerance=±5%, Voltage=50V, Author="CERN DEM JMW", Component Type=Standard, CreateDate=23.06.2014, HelpURL=\\cern.ch\dfs\Applications\Altium\Datasheets\CC0603_C0G_TDK_C.pdf, LatestRevisionDate=23.06.2014, Manufacturer Part Number=CC0603_2.2NF_50V_5%_C0G, Mounted=Yes, Part Description="SMD Multilayer Chip Ceramic Capacitor", Part Number=CC0603_2.2NF_50V_5%_C0G, Pin Count=2, Sense=No, SMD=Yes, Socket=No, Status=Preferred, TC=C0G/NP0
C19 C22 C61: library part CC0402_1NF_50V_10%_X7R, "Non-polarised capacitor", Case=0402, Manufacturer=GENERIC, Manufacturer1 ComponentHeight=0.55mm, Manufacturer1 Example=PHYCOMP, Manufacturer1 Part Number=223858715623, Tolerance=±10%, Voltage=50V, Author="CERN DEM JLC", Component Type=Standard, CreateDate=03.12.2007, HelpURL=\\cern.ch\dfs\Applications\Altium\Datasheets\CC0402_X7R_PHYCOMP.pdf, LatestRevisionDate=03.12.2007, Manufacturer Part Number=CC0402_1NF_50V_10%_X7R, Mounted=Yes, Part Description="SMD Multilayer Chip Ceramic Capacitor", Part Number=CC0402_1NF_50V_10%_X7R, Pin Count=2, Sense=No, SMD=Yes, Socket=No, Status="Not Recommended", TC=X7R
C26 C27 C59: library part CC0402_10NF_25V_10%_X7R, "Non-polarised capacitor", Case=0402, Manufacturer=GENERIC, Manufacturer1 ComponentHeight=0.55mm, Manufacturer1 Example=TDK, Manufacturer1 Part Number=C1005X7R1E103KT, Tolerance=±10%, Voltage=25V, Author="CERN DEM JLC", Component Type=Standard, CreateDate=25.10.2012, HelpURL=\\cern.ch\dfs\Applications\Altium\Datasheets\CC0402_X7R_TDK_C.pdf, LatestRevisionDate=25.10.2012, Manufacturer Part Number=CC0402_10NF_25V_10%_X7R, Mounted=Yes, Part Description="SMD Multilayer Chip Ceramic Capacitor", Part Number=CC0402_10NF_25V_10%_X7R, Pin Count=2, Sense=No, SMD=Yes, Socket=No, Status=Preferred, TC=X7R
C30 C43: library part CC0603_NO-VALUE, "Non-polarised capacitor", Case=0603, Manufacturer1 ComponentHeight=0.9mm, Author="CERN DEM MR", Component Type=Standard, CreateDate=22.11.2016, HelpURL=Undefined, LatestRevisionDate=22.11.2016, Manufacturer=Undefined, Manufacturer Part Number=CC0603_NO-VALUE, Mounted=No, Part Description="Reserved Footprint For 0603(1608) Chip Ceramic Capacitor", Part Number=CC0603_NO-VALUE, Pin Count=2, Sense=No, SMD=Yes, Socket=No, Status=None
C32 C46 C51 C52 C54 C57 C58 C60: library part CC0603_100NF_50V_10%_X7R, "Non-polarised capacitor", Case=0603, Manufacturer=GENERIC, Manufacturer1 ComponentHeight=0.87mm, Manufacturer1 Example=PHYCOMP, Manufacturer1 Part Number=223858615649, Tolerance=±10%, Voltage=50V, Author="CERN DEM JLC", Component Type=Standard, CreateDate=03.12.2007, HelpURL=\\cern.ch\dfs\Applications\Altium\Datasheets\CC0603_X7R_PHYCOMP.pdf, LatestRevisionDate=03.12.2007, Manufacturer Part Number=CC0603_100NF_50V_10%_X7R, Mounted=Yes, Part Description="SMD Multilayer Chip Ceramic Capacitor", Part Number=CC0603_100NF_50V_10%_X7R, Pin Count=2, Sense=No, SMD=Yes, Socket=No, Status=Preferred, TC=X7R
C36: library part CC0603_2.7PF_50V_0.25PF_NP0, "Non-polarised capacitor", Case=0603, Manufacturer=GENERIC, Manufacturer1 ComponentHeight=0.87mm, Manufacturer1 Example=PHYCOMP, Manufacturer1 Part Number=223886715278, Tolerance=±0.25pF, Voltage=50V, Author="CERN DEM JLC", Component Type=Standard, CreateDate=03.12.2007, HelpURL=\\cern.ch\dfs\Applications\Altium\Datasheets\CC0603_NP0_PHYCOMP.pdf, LatestRevisionDate=03.12.2007, Manufacturer Part Number=CC0603_2.7PF_50V_0.25PF_NP0, Mounted=Yes, Part Description="SMD Multilayer Chip Ceramic Capacitor", Part Number=CC0603_2.7PF_50V_0.25PF_NP0, Pin Count=2, Sense=No, SMD=Yes, Socket=No, Status=Preferred, TC=C0G/NP0
C37: "Non-polarised capacitor", Case=0603, Manufacturer=GENERIC, Manufacturer1 ComponentHeight=0.87mm, Manufacturer1 Example=AVX, Manufacturer1 Part Number=ML03510R9AAT2A, Manufacturer Part Number=CC0603_0.9PF_50V_0.05PF_NP0, Tolerance=±0.05pF, Voltage=50V, Author=GK, Component Type=Standard, CreateDate=03.12.2007, HelpURL=\\cern.ch\dfs\Applications\Altium\Datasheets\CC0603_NP0_PHYCOMP.pdf, LatestRevisionDate=03.12.2007, Mounted=Yes, Part Description="SMD Multilayer Chip Ceramic Capacitor", Part Number=CC0603_0.9PF_50V_0.05PF_NP0, Pin Count=2, Sense=No, SMD=Yes, Socket=No, Status=Preferred, TC=C0G/NP0
C38: library part CC0603_3.3NF_50V_5%_C0G, "Non-polarised capacitor", Case=0603, Manufacturer=GENERIC, Manufacturer1 ComponentHeight=0.9mm, Manufacturer1 Example=TDK, Manufacturer1 Part Number=C1608C0G1H332J080AA, Tolerance=±5%, Voltage=50V, Author="CERN DEM MR", Component Type=Standard, CreateDate=02.11.2016, HelpURL=\\cern.ch\dfs\Applications\Altium\Datasheets\CC0603_C0G_TDK_C.pdf, LatestRevisionDate=02.11.2016, Manufacturer Part Number=CC0603_3.3NF_50V_5%_C0G, Mounted=Yes, Part Description="SMD Multilayer Chip Ceramic Capacitor", Part Number=CC0603_3.3NF_50V_5%_C0G, Pin Count=2, Sense=No, SMD=Yes, Socket=No, Status=Preferred, TC=C0G/NP0
C40: "Non-polarised capacitor", Case=0603, Manufacturer=GENERIC, Manufacturer1 ComponentHeight=0.87mm, Manufacturer1 Example=AVX, Manufacturer1 Part Number=06031A390FAT2A, Manufacturer Part Number=CC0603_39PF_100V_1%_NP0, Tolerance=±1%, Voltage=100V, Author=GK, Component Type=Standard, CreateDate=03.12.2007, HelpURL=\\cern.ch\dfs\Applications\Altium\Datasheets\CC0603_NP0_PHYCOMP.pdf, LatestRevisionDate=03.12.2007, Mounted=Yes, Part Description="SMD Multilayer Chip Ceramic Capacitor", Part Number=CC0603_39PF_100V_1%_NP0, Pin Count=2, Sense=No, SMD=Yes, Socket=No, Status=Preferred, TC=C0G/NP0
C41: library part CC0603_330PF_50V_1%_NP0, "Non-polarised capacitor", Case=0603, Manufacturer=GENERIC, Manufacturer1 ComponentHeight=0.87mm, Manufacturer1 Example=PHYCOMP, Manufacturer1 Part Number=223886718331, Tolerance=±1%, Voltage=50V, Author="CERN DEM MR", Component Type=Standard, CreateDate=06.09.2017, HelpURL=\\cern.ch\dfs\Applications\Altium\Datasheets\CC0603_NP0_PHYCOMP.pdf, LatestRevisionDate=06.09.2017, Manufacturer Part Number=CC0603_330PF_50V_1%_NP0, Mounted=Yes, Part Description="SMD Multilayer Chip Ceramic Capacitor", Part Number=CC0603_330PF_50V_1%_NP0, Pin Count=2, Sense=No, SMD=Yes, Socket=No, Status=None, TC=C0G/NP0
C56: library part CC0603_47NF_25V_10%_X7R, "Non-polarised capacitor", Case=0603, Manufacturer=GENERIC, Manufacturer1 ComponentHeight=0.87mm, Manufacturer1 Example=PHYCOMP, Manufacturer1 Part Number=223891615645, Tolerance=±10%, Voltage=25V, Author="CERN DEM JLC", Component Type=Standard, CreateDate=03/12/2007, HelpURL=\\cern.ch\dfs\Applications\Altium\Datasheets\CC0603_X7R_PHYCOMP.pdf, LatestRevisionDate=03/12/2007, Manufacturer Part Number=CC0603_47NF_25V_10%_X7R, Mounted=Yes, Part Description="SMD Multilayer Chip Ceramic Capacitor", Part Number=CC0603_47NF_25V_10%_X7R, Pin Count=2, Sense=No, SMD=Yes, Socket=No, Status=Preferred, TC=X7R
D1: "4V Transient Voltage Suppressor Diode (Uni-Directional)", Case=SOD323, Manufacturer=Littlefuse, Power=735W, Voltage=4V, Author=GK, Bonding=No, Component Type=Standard, ComponentHeight=1.1mm, CreateDate=28.08.2012, Device=AQ4020-01FTG, HelpURL=\\cern.ch\dfs\Applications\Altium\Datasheets\PESD5V0S1UA.pdf, LatestRevisionDate=18.09.2013, Manufacturer Part Number=AQ4020-01FTG, Mounted=Yes, PackageDescription="Small Outline Diode (SOD-323), 1.70mm W X 1.25mm L X 1.10mm H body,  IPC Medium Density", Part Description="Unidirectional ESD Protection for Transient Voltage Suppression", Part Number=AQ4020-01FTG, Pin Count=2, PressFit=No, Sense=No, SMD=Yes, Socket=No
D2 D4: "Zener Diode", Case=SOD-80C, Manufacturer=NEXPERIA, Power=500mW, Voltage=33V, Author="CERN DEM JLC", Bonding=No, Component Type=Standard, ComponentHeight=1.6mm, CreateDate=25.07.2012, Device=BZV55-B33, HelpURL=\\cern.ch\dfs\Applications\Altium\Datasheets\BZV55.pdf, LatestRevisionDate=22.01.2018, Manufacturer Part Number=BZV55-B33, Mounted=Yes, PackageDescription="SOD80C, MELF Diode, 2-Leads, Body 3.5x1.5mm, IPC Medium Density", Part Description="Voltage Regulator Diode", Part Number=BZV55-B33, Pin Count=2, PressFit=No, Sense=No, SMD=Yes, Socket=No
D3 D5: "Low Capacitance Diode Array for ESD Protection in a Single Data Line", Case=SOT23, Manufacturer=ONSEMI, Power=215mA, Voltage=70V, Author=GK, Bonding=No, Component Type=Standard, ComponentHeight=1.1mm, CreateDate=18.01.2010, Device=SZNUP1301ML3T1G, HelpURL=\\cern.ch\dfs\Applications\Altium\Datasheets\BAR66.pdf, LatestRevisionDate=05.10.2010, Manufacturer Part Number=SZNUP1301ML3T1G, Mounted=Yes, PackageDescription="SOT23 3-Leads, Pitch 0.95mm - Body 1.3x2.9mm, IPC Medium Density", Part Description="Low Capacitance Diode Array for ESD Protection in a Single Data Line", Part Number=SZNUP1301ML3T1G, Pin Count=3, PressFit=No, Sense=No, SMD=Yes, Socket=No
D6: "6V Bi-directional,ESD Protection for Transient Voltage Suppressor Diode", Case=SOD323, Manufacturer=Littlefuse, Power=450W, Voltage=6V, Author=GK, Bonding=No, Component Type=Standard, ComponentHeight=1.14mm, CreateDate=22.07.2015, Device=AQ4021-01FTG-C, HelpURL=\\cern.ch\dfs\Applications\Altium\Datasheets\CDSOD323-T12C-DSL.pdf, LatestRevisionDate=19.12.2017, Manufacturer Part Number=AQ4021-01FTG-C, Mounted=Yes, PackageDescription="SOD-323 Diode; 1.75mm W X 1.30mm L X 1.14mm H Body, IPC Medium Density", Part Description="Bi-directional ESD Protection for Transient Voltage Suppressor Diode", Part Number=AQ4021-01FTG-C, Pin Count=2, PressFit=No, Sense=No, SMD=Yes, Socket=No
FTG1: library part FIDUCIAL_TARGET_C100-200, "Fiducial Target", Author="CERN DEM JLC", Component Type="Standard (No BOM)", ComponentHeight=0mm, CreateDate=09.02.2010, Family=Fiducial, HelpURL=Undefined, LatestRevisionDate=04.04.2012, Mounted=No, PackageDescription="Round Fiducial Target, Top Layer, 1.0mm, Top Solder 2.0mm, Keepout =2.0mm", Part Description="Round Fiducial Target, Top Layer, 1.0mm, Top Solder 2.0mm, Keepout =2.0mm", Part Number=FIDUCIAL_TARGET_C100-200, Pin Count=1, Sense=No, SMD=Yes, Socket=No, Status=None
FTG2: library part FIDUCIAL_TARGET_S100-200, "Fiducial Target", Author="CERN DEM JLC", Component Type="Standard (No BOM)", ComponentHeight=0mm, CreateDate=09.02.2010, Family=Fiducial, HelpURL=Undefined, LatestRevisionDate=04.04.2012, Mounted=No, PackageDescription="Square Fiducial Target, Top Layer, 1.0mm, Top Solder 2.0mm, Keepout =2.0mm", Part Description="Square Fiducial Target, Top Layer, 1.0mm, Top Solder 2.0mm, Keepout =2.0mm", Part Number=FIDUCIAL_TARGET_S100-200, Pin Count=1, Sense=No, SMD=Yes, Socket=No, Status=None
IC1: "GaN Wideband Transistor 28V, 5W, DC - 6GHz", Case=SOIC8, Manufacturer=MACOM, Author="CERN DEM BC", Bonding=No, Component Type=Standard, ComponentHeight=1.67mm, CreateDate=23.08.2019, Device=NPTB00004A, HelpURL=\\cern.ch\dfs\Applications\Altium\Datasheets\NPTB00004A.pdf, LatestRevisionDate=23.08.2019, Manufacturer Part Number=NPTB00004A, Mounted=Yes, PackageDescription="SOIC, 1.27mm pitch; 8 pin, 3.89mm W X 4.90mm L X 1.67mm H body (w/thermal tab 2.45mm X 3.35mm), IPC Medium Density", Part Description="GaN Wideband Transistor 28V, 5W, DC - 6GHz", Part Number=NPTB00004A, Pin Count=9, PressFit=No, Sense=No, SMD=Yes, Socket=No
IC2: "50Ohm, 10 to 540MHz, 25W, 20dB Bi-Directional Coupler", Manufacturer=MINI-CIRCUITS, Author="CERN DEM BC", Bonding=No, ComponentHeight=6.35mm, Component Type=Standard, CreateDate=26.08.2019, Device=SYDC-20-62HP+, HelpURL=\\cern.ch\dfs\Applications\Altium\Datasheets\SYDC-20-62HP+.pdf, LatestRevisionDate=26.08.2019, Manufacturer Part Number=SYDC-20-62HP+, Mounted=Yes, PackageDescription="MINI-CIRCUITS AH202-1 Case, Body 12.7mm L X 9.65mm W X 6.35mm H", Part Description="50Ohm, 10 to 540MHz, 25W, 20dB Bi-Directional Coupler", Part Number=SYDC-20-62HP+, Pin Count=8, PressFit=No, Sense=No, SMD=Yes, Socket=No
IC3 IC4 IC12: "DC to 6 GHz, 45 dB TruPwr Detector With Envelope Threshold Detection", Case=QFN16, Manufacturer="ANALOG DEVICES", Author="CERN DEM MR", Bonding=No, ComponentHeight=0.8mm, Component Type=Standard, CreateDate=26.09.2017, Device=ADL5904ACPZN-R7, HelpURL=\\cern.ch\dfs\Applications\Altium\Datasheets\ADL5904ACPZN-R7.pdf, LatestRevisionDate=26.09.2017, Manufacturer Part Number=ADL5904ACPZN-R7, Mounted=Yes, PackageDescription="QFN, 0.50mm Pitch, Square; 16 Pin, 3.00mm L X 3.00mm W X 0.80mm H Body (w/Thermal Tab 1.75 X 1.75mm),  IPC Medium Density", Part Description="DC to 6 GHz, 45 dB TruPwr Detector With Envelope Threshold Detection", Part Number=ADL5904ACPZN-R7, Pin Count=17, PressFit=No, Sense=No, SMD=Yes, Socket=No
IC5 IC6 IC13: "Operational Amplifier", Case=SOT23-5, Manufacturer="MICROCHIP TECHNOLOGY", Author="CERN DEM BC", Bonding=No, ComponentHeight=1.45mm, Component Type=Standard, CreateDate=22.08.2019, Device=MCP6291T-E/OT, HelpURL=\\cern.ch\dfs\Applications\Altium\Datasheets\MCP6291T-E-OT.pdf, LatestRevisionDate=22.08.2019, Manufacturer Part Number=MCP6291T-E/OT, Mounted=Yes, PackageDescription="SOT, 0.95mm pitch; 5 pin, 1.55mm W X 2.90mm L X 1.45mm H body, IPC Medium Density", Part Description="1.0mA, 10 MHz Rail-to-Rail Operational Amplifier", Part Number=MCP6291T-E/OT, Pin Count=5, PressFit=No, Sense=No, SMD=Yes, Socket=No
IC7: "±1°C, SMBus-Compatible Remote/Local Temperature Sensor with Overtemperature Alarm", Case=SON6, Manufacturer=MAXIM, Author="CERN DEM JLC", Bonding=No, ComponentHeight=0.8mm, Component Type=Standard, CreateDate=26.11.2013, Device=MAX6642ATT94+T, HelpURL=\\cern.ch\dfs\Applications\Altium\Datasheets\MAX6642ATT94+T.pdf, LatestRevisionDate=26.11.2013, Manufacturer Part Number=MAX6642ATT94+T, Mounted=Yes, PackageDescription="SON, 0.95mm Pitch; 6 Pin, 3.00mm W X 3mm L X 0.80mm H body (w/Thermal Tab 1.6mm x 2.4mm)", Part Description="0°C to +125°C, ±1°C, SMBus-Compatible Remote/Local Temperature Sensor with Overtemperature Alarm (Address 1001 010)", Part Number=MAX6642ATT94+T, Pin Count=7, PressFit=No, Sense=No, SMD=Yes, Socket=No
IC8: "20MHz to 1GHz IF Gain Block", Case=SOT89, Manufacturer="ANALOG DEVICES", Author="CERN DEM BC", Bonding=No, ComponentHeight=1.6mm, Component Type=Standard, CreateDate=19.08.2019, Device=ADL5536ARKZ, HelpURL=\\cern.ch\dfs\Applications\Altium\Datasheets\ADL5536ARKZ.pdf, LatestRevisionDate=19.08.2019, Manufacturer Part Number=ADL5536ARKZ, Mounted=Yes, PackageDescription="SOT89, 1.50mm Pitch; 3-Leads, 2.5mm W X 4.5mm L X 1.6mm H body", Part Description="20MHz to 1GHz IF Gain Block", Part Number=ADL5536ARKZ, Pin Count=4, PressFit=No, Sense=No, SMD=Yes, Socket=No
IC9: "50 Ohm, 5 To 2000MHz, Directional Coupler", Manufacturer=MINI-CIRCUITS, Author="CERN DEM BC", Bonding=No, ComponentHeight=4.06mm, Component Type=Standard, CreateDate=22.08.2019, Device=TCD-9-1WX+, HelpURL=\\cern.ch\dfs\Applications\Altium\Datasheets\TCD-9-1WX+.pdf, LatestRevisionDate=22.08.2019, Manufacturer Part Number=TCD-9-1WX+, Mounted=Yes, PackageDescription="MINI-CIRCUITS Case Style DB1627 - Body 4.06X3.81mm", Part Description="50 Ohms, 5 To 2000MHz, Directional Coupler", Part Number=TCD-9-1WX+, Pin Count=6, PressFit=No, Sense=No, SMD=Yes, Socket=No
IC10: "Monolithic Amplifier", Manufacturer=MINI-CIRCUITS, Author="CERN DEM BC", Bonding=No, ComponentHeight=1.6mm, Component Type=Standard, CreateDate=22.08.2019, Device=PHA-1+, HelpURL=\\cern.ch\dfs\Applications\Altium\Datasheets\PHA-1+.pdf, LatestRevisionDate=22.08.2019, Manufacturer Part Number=PHA-1+, Mounted=Yes, PackageDescription="MINI-CIRCUITS DF782 Case, 1.50mm pitch; 4 pin, 2.44mm W X 4.49mm L", Part Description="0.05-6GHz Surface Mount Monolithic Amplifier", Part Number=PHA-1+, Pin Count=4, PressFit=No, Sense=No, SMD=Yes, Socket=No
IC11: "High Accuracy anyCAP® 50 mA Low Dropout Linear Regulator", Case=SOT23-6, Manufacturer="ANALOG DEVICES", Author="CERN DEM JLC", Bonding=No, ComponentHeight=1.45mm, Component Type=Standard, CreateDate=30.11.2011, Device=ADP3300ARTZ-3.3-RL7, HelpURL=\\cern.ch\dfs\Applications\Altium\Datasheets\ADP3300ARTZ-3.3-RL7.pdf, LatestRevisionDate=30.11.2011, Manufacturer Part Number=ADP3300ARTZ-3.3-RL7, Mounted=Yes, PackageDescription="SOT23, 0.95mm pitch; 6 pin, 1.6mm W X 2.9mm L X 1.45mm H body, IPC Medium Density", Part Description="3.3V High Accuracy anyCAP® 50 Ma Low Dropout Linear Regulator", Part Number=ADP3300ARTZ-3.3-RL7, Pin Count=6, PressFit=No, Sense=No, SMD=Yes, Socket=No
IC14: "GaAs MMIC T/R Switch DC - 4 GHz", Case=SOT23-6, Manufacturer="ANALOG DEVICES", Author="CERN DEM MR", Bonding=No, Component Type=Standard, ComponentHeight=1.45mm, CreateDate=26.09.2017, Device=HMC544AE, HelpURL=\\cern.ch\dfs\Applications\Altium\Datasheets\HMC544AE.pdf, LatestRevisionDate=26.09.2017, Manufacturer Part Number=HMC544AE, Mounted=Yes, PackageDescription="SOT23, 6-Leads, Body 1.6x3.0mm, Pitch 0.95mm, IPC Medium Density", Part Description="GaAs MMIC T/R Switch DC - 4 GHz", Part Number=HMC544AE, Pin Count=6, PressFit=No, Sense=No, SMD=Yes, Socket=No
J1: library part LINK_CONSMA002-SMD-G, Manufacturer="LINK TECHNOLOGIES", Manufacturer Part Number=CONSMA002-SMD-G, Author="CERN DEM BC", ComponentHeight=10.8mm, Component Type=Standard, CreateDate=28.08.2019, Family=SMA, HelpURL=\\cern.ch\dfs\Applications\Altium\Datasheets\LINK_CONSMA002-SMD-G.pdf, LatestRevisionDate=28.08.2019, Mounted=Yes, Part Description="SMA Female Right Angled - Surface Mount", Part Number=LINK_CONSMA002-SMD-G, Pin Count=2, PressFit=No, Sense=No, SMD=Yes, Socket=No, Status=None
J2: "50 Ohm, SMA Edge Mount PCB, With Jam Nut And Lock Washer", Manufacturer=MOLEX, Manufacturer Part Number=73251-2120, Part Number=MOLEX_73251-2120, Author="CERN DEM JLC", ComponentHeight=5.75mm, Component Type=Standard, CreateDate=26.10.2016, Family=SMA, HelpURL=\\cern.ch\dfs\Applications\Altium\Datasheets\MOLEX_73251-2121.pdf, LatestRevisionDate=26.10.2016, Mounted=Yes, Part Description="50 Ohm, SMA Edge Mount PCB, With Jam Nut And Lock Washer", Pin Count=5, PressFit=No, Sense=No, SMD=Yes, Socket=No, Status=None
J3 J4: library part HIROSE_U.FL-R-SMT-1(10), Manufacturer="HIROSE (HRS)", Manufacturer Part Number=U.FL-R-SMT-1(10), Author="CERN DEM JLC", ComponentHeight=1.25mm, Component Type=Standard, CreateDate=24.03.2010, Family=U.FL, HelpURL=\\cern.ch\dfs\Applications\Altium\Datasheets\HIROSE_U.FL-R-SMT-1(10).pdf, LatestRevisionDate=24.03.2010, Mounted=Yes, Part Description="Up to 6GHz Ultra Small Surface Mount Male Coaxial Connectors U.FL Series", Part Number=HIROSE_U.FL-R-SMT-1(10), Pin Count=2, PressFit=No, Sense=No, SMD=Yes, Socket=No, Status=None
L1 L4 L8 L11 L12: library part IND0603_MURATA_BLM18HE102SN1, Case=0603, Manufacturer=MURATA, Manufacturer Part Number=BLM18HE102SN1, Power=600mA, Resistance=0.35R, Tolerance=±25%, Author="CERN DEM JLC", ComponentHeight=0.95mm, Component Type=Standard, CreateDate=09.12.2013, HelpURL=\\cern.ch\dfs\Applications\Altium\Datasheets\IND0603_MURATA_BLM18H.pdf, LatestRevisionDate=25.10.2018, Mounted=Yes, Part Description="SMD EMIFIL Suppression Chip Ferrite Bead", Part Number=IND0603_MURATA_BLM18HE102SN1, Pin Count=2, Sense=No, SMD=Yes, Socket=No, Status=None
L2 L3: library part IND0805_1UH_20%_WURTH_74479773210, "Inductor", Case=0805, Manufacturer="WURTH ELEKTRONIK", Manufacturer Part Number=74479773210, Power=800mA, Resistance=0.18R, Tolerance=±20%, Author="CERN DEM BC", ComponentHeight=0.6mm, Component Type=Standard, CreateDate=26.08.2019, HelpURL=\\cern.ch\dfs\Applications\Altium\Datasheets\IND_WURTH_WE-PMI_74479773210.pdf, LatestRevisionDate=26.08.2019, Mounted=Yes, Part Description="Power Multilayer Inductor (WE-PMI Series)", Part Number=IND0805_1UH_20%_WURTH_74479773210, Pin Count=2, Sense=No, SMD=Yes, Socket=No, Status=None
L5 L9: library part IND_1UH_2%_ABRACON_AISC-1008, "Inductor", Case=1008, Manufacturer=ABRACON, Manufacturer Part Number=AISC-1008-1R0G, Power=370mA, Resistance=1.8R, Tolerance=±2%, Author="CERN DEM BC", ComponentHeight=2.29mm, Component Type=Standard, CreateDate=26.08.2019, HelpURL=\\cern.ch\dfs\Applications\Altium\Datasheets\IND_ABRACON_AISC-1008.pdf, LatestRevisionDate=26.08.2019, Mounted=Yes, Part Description="SMD Ceramic Wire-Wound Chip Inductor", Part Number=IND_1UH_2%_ABRACON_AISC-1008, Pin Count=2, Sense=No, SMD=Yes, Socket=No, Status=None
L6: library part IND0603_4.7NH_2%_MURATA_LQW18AN4N7G8Z, "Inductor With Core", Case=0603, Manufacturer=MURATA, Manufacturer Part Number=LQW18AN4N7G8Z, Power=1.5A, Resistance=0R054, Tolerance=±2%, Author="CERN DEM BC", ComponentHeight=1mm, Component Type=Standard, CreateDate=26.08.2019, HelpURL=\\cern.ch\dfs\Applications\Altium\Datasheets\IND_MURATA_LQW18AN4N7G8Z.pdf, LatestRevisionDate=26.08.2019, Mounted=Yes, Part Description="Wirw Wond RF Inductor For Automotive", Part Number=IND0603_4.7NH_2%_MURATA_LQW18AN4N7G8Z, Pin Count=2, Sense=No, SMD=Yes, Socket=No, Status=None
L7: library part IND0603_6.8NH_2%_MURATA_LQW18AN6N8G8Z, "Inductor With Core", Case=0603, Manufacturer=MURATA, Manufacturer Part Number=LQW18AN6N8G8Z, Power=1.9A, Resistance=0R04, Tolerance=±2%, Author="CERN DEM BC", ComponentHeight=1mm, Component Type=Standard, CreateDate=26.08.2019, HelpURL=\\cern.ch\dfs\Applications\Altium\Datasheets\IND_MURATA_LQW18AN6N8G8Z.pdf, LatestRevisionDate=26.08.2019, Mounted=Yes, Part Description="Wirw Wond RF Inductor For Automotive", Part Number=IND0603_6.8NH_2%_MURATA_LQW18AN6N8G8Z, Pin Count=2, Sense=No, SMD=Yes, Socket=No, Status=None
L10: library part IND_330NH_2%_COILCRAFT_0603LS, "Inductor With Core", Case=0603, Manufacturer=COILCRAFT, Manufacturer Part Number=0603LS-331XGL, Power=560mA, Resistance=0R46, Tolerance=±2%, Author="CERN DEM BC", ComponentHeight=1.12mm, Component Type=Standard, CreateDate=29.08.2019, HelpURL=\\cern.ch\dfs\Applications\Altium\Datasheets\IND_COILCRAFT_0603LS.pdf, LatestRevisionDate=29.08.2019, Mounted=Yes, Part Description="SMT Chip Inductor", Part Number=IND_330NH_2%_COILCRAFT_0603LS, Pin Count=2, Sense=No, SMD=Yes, Socket=No, Status=None
P3 P6 P7 P8: library part HDR2X4, "Header, 4-Pin, Dual Row", Manufacturer=-, Package="2x4 pin SMD", Generic=yes, Manufacturer Part Number=-, Mounting type=SMT, Remarks="ordinary goldpin socket", Supplier 1=TME, Supplier 2=-, Supplier 3=-, Supplier Part Number 1=ZL264-8DG, Supplier Part Number 2=-, Supplier Part Number 3=-